# Altium PCB Button_PCB.PcbDoc
Units mm, origin at the board's own origin, x right, y up, seen from the top; angles counter-clockwise.
Board outline 35.33 x 30.23 mm, 2 copper layers (Top Layer, Bottom Layer); 11 components, 14 nets, 43 pads, 6 vias.
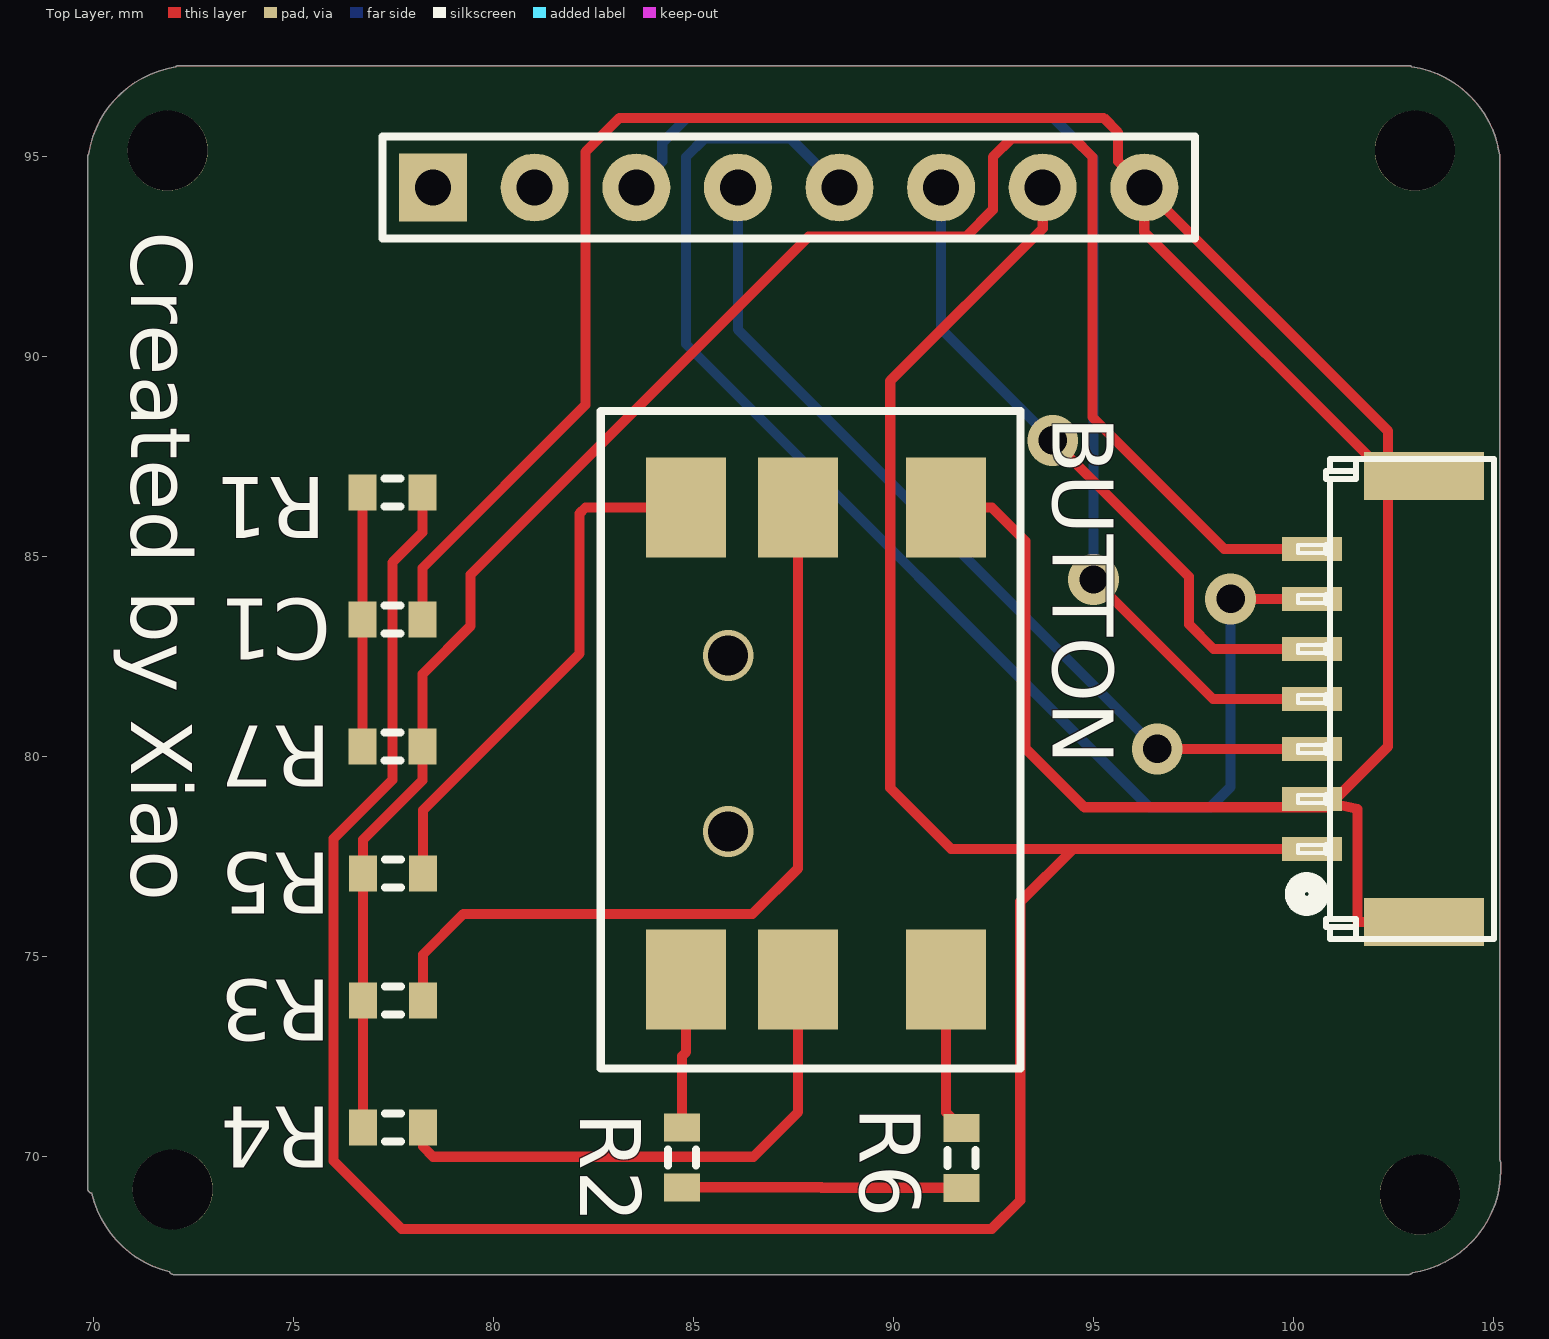
[diagram p0: Top Layer view]
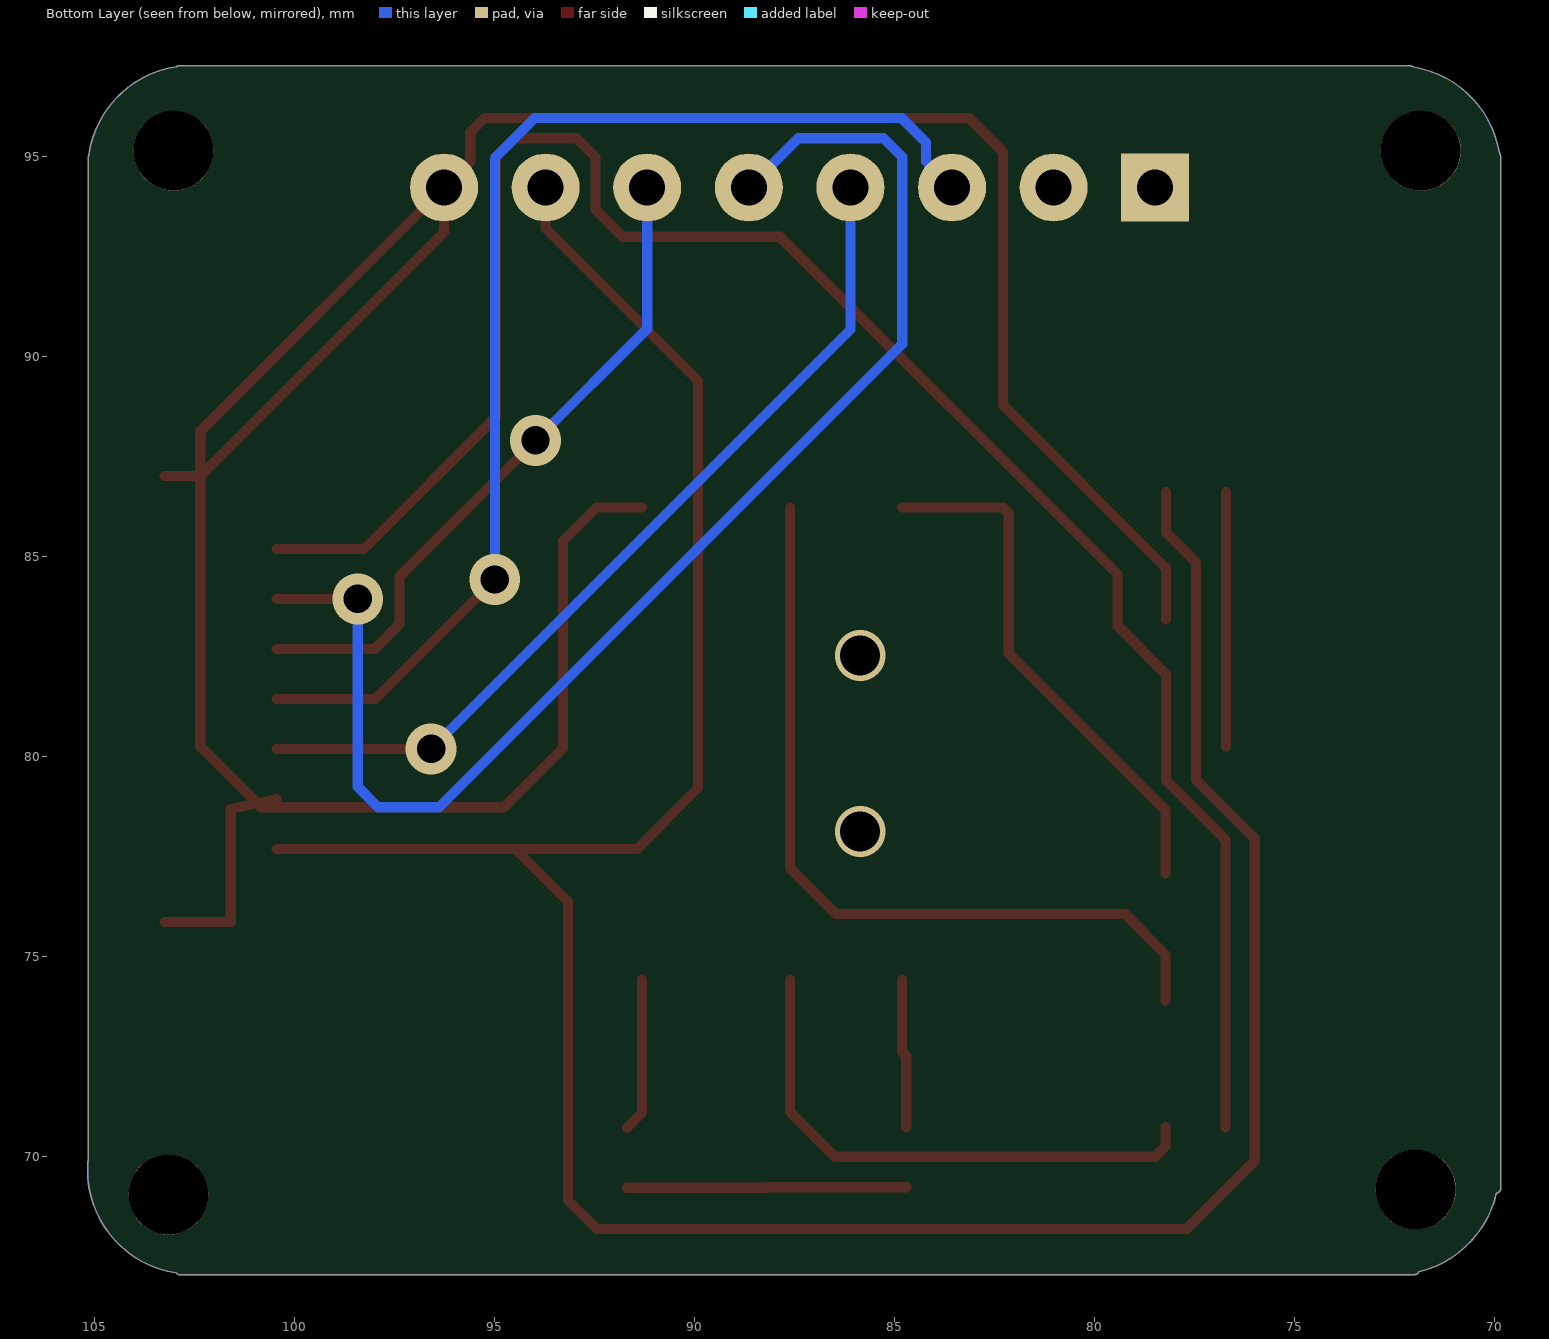
[diagram p1: Bottom Layer view, seen from below]

## Layer stack, top to bottom
Top Solder: solder mask 0.0102, Solder Resist, Dk 3.5
Top Layer: signal copper 0.0356
Dielectric 1: dielectric 0.32, FR-4, Dk 4.8
Bottom Layer: signal copper 0.0356
Bottom Solder: solder mask 0.0102, Solder Resist, Dk 3.5

## Board outline
69.957,69.089 cw(c69.977,69.215) 69.85,69.215 69.85,94.557 cw(c72.453,94.673) 69.85,94.789 69.85,94.996 cw(c69.977,94.996) 69.879,95.077 cw(c72.453,94.673) 72.048,97.247 cw(c72.136,97.155) 72.136,97.282 102.522,97.282 cw(c102.569,94.686) 102.617,97.282 102.87,97.282 cw(c102.87,97.155) 102.949,97.255 cw(c102.569,94.678) 105.149,95.039 cw(c105.029,94.996) 105.156,94.996 105.156,69.914 cw(c105.046,69.851) 105.173,69.86 cw(c102.569,69.678) 105.179,69.678 cw(c102.569,69.678) 102.965,67.098 cw(c102.87,67.183) 102.87,67.056 72.644,67.056 cw(c72.515,69.678) 72.387,67.056 72.009,67.056 cw(c72.009,67.183) 71.895,67.127 cw(c72.515,69.678)

## Design rules (kind name [scope] priority, off if disabled: settings)
Clearance [All] p1: gap=0.254 ignorepadtopadclearanceinfootprint=FALSE except(0: Arc-Hole Track-Hole SMDPad-Hole THPad-Hole Via-Hole Fill-Hole Poly-Hole Region-Hole Text-Hole)
PolygonConnect [All] p1: connectstyle=Relief reliefconductorwidth=0.254 reliefentries=4 polygonreliefangle="90 Angle" airgapwidth=0.254
RoutingVias [All] p1: holewidth=0.711 width=1.27 viastyle="Through Hole" minholewidth=0.711 minwidth=1.27 maxholewidth=0.711 maxwidth=1.27
SolderMaskExpansion [All] p1: expansion=0.102 istentingtop=FALSE
Width [All] p1: maxlimit=0.254 minlimit=0.254 preferedwidth=0.254
30 further rules are at their usual default settings.

## Classes and differential pairs
component class Sheet1: BUTTON C1 R1 R2 R3 R4 R5 R6 R7

## Components (designator, comment, footprint, x,y, rotation, side; value= is the part's Value field where it differs from the comment)
BUTTON "BUTTON_5_Directions" PCBComponent_1 91.313,86.233 r270 top
C1 "Cap" J1-0603 77.47,83.439 r0 top value=100nF
GH1.25 "GH1.25_7PIN带锁母座" GH1.25-WS-7P 102.957,81.447 r270 top
GH2.54 "HDR-1X8" HDR2.54-M-LI-8P 87.376,94.234 r0 top
R1 "0603" J1-0603 77.47,86.614 r180 top value=100K
R2 "0603" J1-0603 84.709,69.989 r270 top value=300K
R3 "0603" J1-0603 77.482,73.914 r0 top value=33K
R4 "0603" J1-0603 77.482,70.739 r180 top value=100K
R5 "0603" J1-0603 77.482,77.089 r0 top value=0R
R6 "0603" J1-0603 91.694,69.977 r270 top value=10M
R7 "0603" J1-0603 77.47,80.264 r0 top value=0R

## Footprints (in the part's own frame and the unit in brackets; to place one, negate y for a bottom-side part, rotate by r counter-clockwise, add the part's x,y. Pads: shape width x height; smd on the part's side, far side on the other; paste and mask are expansions set on the pad)
GH1.25-WS-7P [mm] "A1257WR-S-7P"
  rect 0.6x1.5 smd: 1(3.75,-2.5) 2(2.5,-2.5) 3(1.25,-2.5) 4(0,-2.5) 5(-1.25,-2.5) 6(-2.5,-2.5) 7(-3.75,-2.5)
  rect 1.2x3 smd: 8(-5.575,0.3) 9(5.575,0.3)
  silkscreen extent -6,-2.93 6,2.05, body extent -6,-2.8 6,2.1, height 4.4
HDR2.54-M-LI-8P [mm] "排母，8脚"
  rect 1.7x1.7 hole 0.9: 1(-8.89,0)
  round 1.7 hole 0.9: 2(-6.35,0) 3(-3.81,0) 4(-1.27,0) 5(1.27,0) 6(3.81,0) 7(6.35,0) 8(8.89,0)
  silkscreen extent -10.16,-1.27 10.16,1.27, body extent -10.16,-1.27 10.16,1.27, height 8.5
J1-0603 [mm] "Chip Resistor, Body 1.6x0.8mm, IPC High Density"
  rect 0.7x0.9 smd: 1(-0.75,0) 2(0.75,0)
  silkscreen extent -0.2,-0.35 0.2,0.35, body extent -0.85,-0.48 0.85,0.48, height 0.9
PCBComponent_1 [mm]
  rect 2.5x2 smd mask+0.051: 1(0,0) 2(0,-3.7) 3(0,-6.5) 4(11.8,-6.5) 5(11.8,-3.7) 6(11.8,0)
  silkscreen extent -2.41,-8.64 14.02,1.85

## Part data
C1: "Capacitor", LatestRevisionDate=17-Jul-2002, LatestRevisionNote="Re-released for DXP Platform.", PackageDescription="Radial Cap, Thru-Hole; 2 Leads; 0.3 in Pin Spacing", PackageReference=RAD-0.3, Published=8-Jun-2000, Publisher="Altium Limited"
GH2.54: library part "Header 8", "8P接插件", BOM名称=8P接插件, 下单链接=https://item.taobao.com/item.htm?ft=t&id=613637044352, 淘宝ID=小糖豆的小窝窝
R1 R2 R3 R4 R5 R6 R7: library part Res3, "Resistor", LatestRevisionDate=29-May-2009, LatestRevisionNote="IPC-7351 Footprint Added.", PackageDescription="Chip Resistor", PackageReference=J1-0603, Published=8-Jun-2000, Publisher="Altium Limited"

## Free pads (board coordinates)
  round 2 hole 2: 1(71.85,95.155) 1(71.977,69.183) 1(103.029,95.155) 1(103.156,69.056)

## Via types
v1: diameter 1.27, hole 0.711, Top Layer to Bottom Layer, 4 vias
v2: diameter 1.27, hole 1, Top Layer to Bottom Layer, 2 vias

## Nets (pads, with @x,y where several pads share a name; then routed paths per layer and width w, separated by ;. In a path a pad name is that pad's centre, name@x,y a point inside that pad or via, vN(x,y) a via of type N, cw(c..) or ccw(c..) an arc to the next point about the centre after c; other vN are vias at no path point)
BUTTON_AD: GH1.25.7 R3.1 R4.2 R5.1 R7.2 | length 49.3
  Top Layer w0.254: R4.2 R3.1 R5.1 76.732,77.927 78.22,79.415 R7.2 78.22,82.067 79.426,83.273 79.426,84.557 87.872,93.003 91.809,93.003 92.481,93.675 92.481,94.996 92.95,95.465 94.502,95.465 94.971,94.996 94.971,88.494 98.267,85.197 GH1.25.7
GND: BUTTON.1 C1.2 GH1.25.2 GH1.25.8 GH1.25.9 GH2.54.8 | length 79.4
  Top Layer w0.254: C1.2 78.22,84.722 82.296,88.798 82.296,95.123 83.146,95.973 95.25,95.973 95.611,95.612 95.611,94.889 GH2.54.8 ; BUTTON.1 92.456,86.233 93.294,85.395 93.294,80.213 94.767,78.74 100.838,78.74 GH1.25.2@100.938,78.84 ; GH1.25.2 GH1.25.2@100.938,78.84 ; GH1.25.9 101.6,75.872 101.6,78.693 GH1.25.2@100.938,78.84 ; GH1.25.8 GH1.25.8@102.362,87.022 ; GH2.54.8 102.362,88.138 GH1.25.8@102.362,87.022 ; GH2.54.8 96.266,93.118 GH1.25.8@102.362,87.022 ; GH1.25.2@100.938,78.84 102.362,80.264 GH1.25.8@102.362,87.022
NetBUTTON_2: BUTTON.2 R3.2 | length 20.4
  Top Layer w0.254: R3.2 78.232,75.057 79.248,76.073 86.47,76.073 87.613,77.216 BUTTON.2
NetBUTTON_3: BUTTON.3 R5.2 | length 13.3
  Top Layer w0.254: R5.2 78.232,78.664 82.15,82.582 82.15,86.087 82.296,86.233 BUTTON.3
NetBUTTON_4: BUTTON.4 R2.1 | length 3.7
  Top Layer w0.254: R2.1 84.709,72.517 84.813,72.621 BUTTON.4
NetBUTTON_5: BUTTON.5 R4.1 | length 13.7
  Top Layer w0.254: R4.1 78.232,70.256 78.486,70.002 86.495,70.002 87.613,71.12 BUTTON.5
NetBUTTON_6: BUTTON.6 R6.1 | length 3.9
  Top Layer w0.254: BUTTON.6 91.313,71.108 R6.1
NetC1_1: C1.1 R1.2 R7.1 | length 6.3
  Top Layer w0.254: R7.1 C1.1 R1.2
NetR2_2: R2.2 R6.2 | length 7
  Top Layer w0.254: R2.2 88.189,69.239 88.201,69.227 R6.2
OLED_DC: GH1.25.4 GH2.54.3 | length 30.1
  Top Layer w0.254: v1(94.996,84.433) 97.982,81.447 GH1.25.4
  Bottom Layer w0.254: GH2.54.3 84.214,94.882 84.214,95.351 84.836,95.973 93.994,95.973 94.996,94.971 v1(94.996,84.433)
OLED_RST: GH1.25.3 GH2.54.4 | length 22.2
  Top Layer w0.254: v1(96.591,80.197) GH1.25.3
  Bottom Layer w0.254: GH2.54.4 86.106,90.682 v1(96.591,80.197)
SPI2_MOSI: GH1.25.6 GH2.54.5 | length 34.6
  Top Layer w0.254: v1(98.425,83.947) GH1.25.6
  Bottom Layer w0.254: GH2.54.5 87.415,95.465 85.28,95.465 84.811,94.996 84.811,90.322 96.393,78.74 97.917,78.74 98.425,79.248 v1(98.425,83.947)
SPI2_SCK: GH1.25.5 GH2.54.6 | length 16.8
  Top Layer w0.254: v1(93.98,87.909) 97.384,84.506 97.384,83.312 97.999,82.697 GH1.25.5
  Bottom Layer w0.254: GH2.54.6 91.186,90.703 v1(93.98,87.909)
VCC: GH1.25.1 GH2.54.7 R1.1 | length 72.9
  Top Layer w0.254: R1.1 78.22,85.611 77.47,84.861 77.47,79.426 75.997,77.953 75.997,69.901 77.699,68.199 92.456,68.199 93.167,68.91 93.167,76.376 94.488,77.697 ; GH2.54.7 93.726,93.21 89.916,89.4 89.916,79.221 91.44,77.697 94.488,77.697 ; GH1.25.1 94.488,77.697
pads on no net: GH2.54.1 GH2.54.2
copper on no net:
  other v2: 85.863,78.133 85.863,82.533

## Polygon pours and split planes (outlines as drawn)
GND on Top Layer "NONET_L01_P003" (solid, shelved, pour order 3): 69.957,69.089 cw(c69.977,69.215) 69.85,69.215 69.85,94.557 cw(c72.453,94.673) 69.85,94.789 69.85,94.996 cw(c69.977,94.996) 69.879,95.077 cw(c72.453,94.673) 72.048,97.247 cw(c72.136,97.155) 72.136,97.282 102.522,97.282 cw(c102.569,94.686) 102.617,97.282 102.87,97.282 cw(c102.87,97.155) 102.949,97.255 cw(c102.569,94.678) 105.149,95.039 cw(c105.029,94.996) 105.156,94.996 105.156,69.914 cw(c105.046,69.851) 105.173,69.86 cw(c102.569,69.678) 105.179,69.678 cw(c102.569,69.678) 102.965,67.098 cw(c102.87,67.183) 102.87,67.056 72.644,67.056 cw(c72.515,69.678) 72.387,67.056 72.009,67.056 cw(c72.009,67.183) 71.895,67.127 cw(c72.515,69.678)
GND on Bottom Layer "NONET_L02_P004" (solid, shelved, pour order 4): 69.957,69.089 cw(c69.977,69.215) 69.85,69.215 69.85,94.557 cw(c72.453,94.673) 69.85,94.789 69.85,94.996 cw(c69.977,94.996) 69.879,95.077 cw(c72.453,94.673) 72.048,97.247 cw(c72.136,97.155) 72.136,97.282 102.522,97.282 cw(c102.569,94.686) 102.617,97.282 102.87,97.282 cw(c102.87,97.155) 102.949,97.255 cw(c102.569,94.678) 105.149,95.039 cw(c105.029,94.996) 105.156,94.996 105.156,69.914 cw(c105.046,69.851) 105.173,69.86 cw(c102.569,69.678) 105.179,69.678 cw(c102.569,69.678) 102.965,67.098 cw(c102.87,67.183) 102.87,67.056 72.644,67.056 cw(c72.515,69.678) 72.387,67.056 72.009,67.056 cw(c72.009,67.183) 71.895,67.127 cw(c72.515,69.678)

## Silkscreen, mask and mechanical layers (free items; w line width, h text height)
Top Overlay:
  text "Created by Xiao" at 70.942,93.142 h1.52 r270
Mechanical 1:
  lines w0.254: 69.977,69.215 69.977,94.996 ; 70.017,69.72 ccw(c72.515,69.678) 72.644,67.183 ; 70.058,94.035 cw(c72.453,94.673) 72.514,97.15 ; 72.009,67.183 102.87,67.183 ; 72.136,97.155 102.87,97.155 ; 102.364,67.204 ccw(c102.569,69.678) 105.046,69.851 ; 102.492,97.154 cw(c102.572,94.678) 105.029,94.996 105.029,69.342